# EAGLE board usb-isolator (EAGLE 7.7.0)
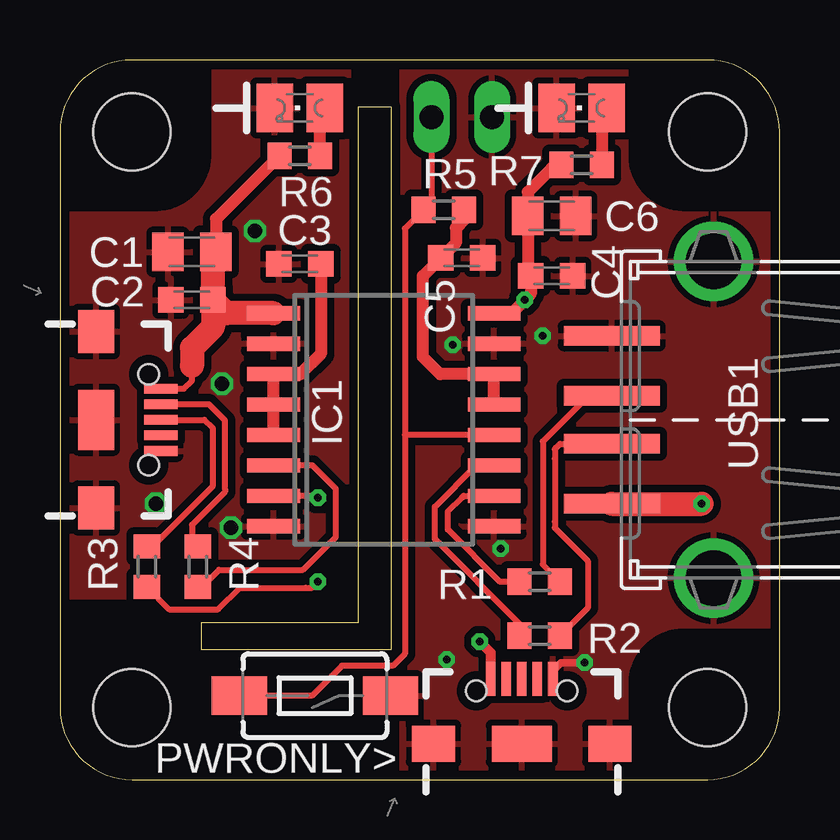
[diagram p0: board, top side]
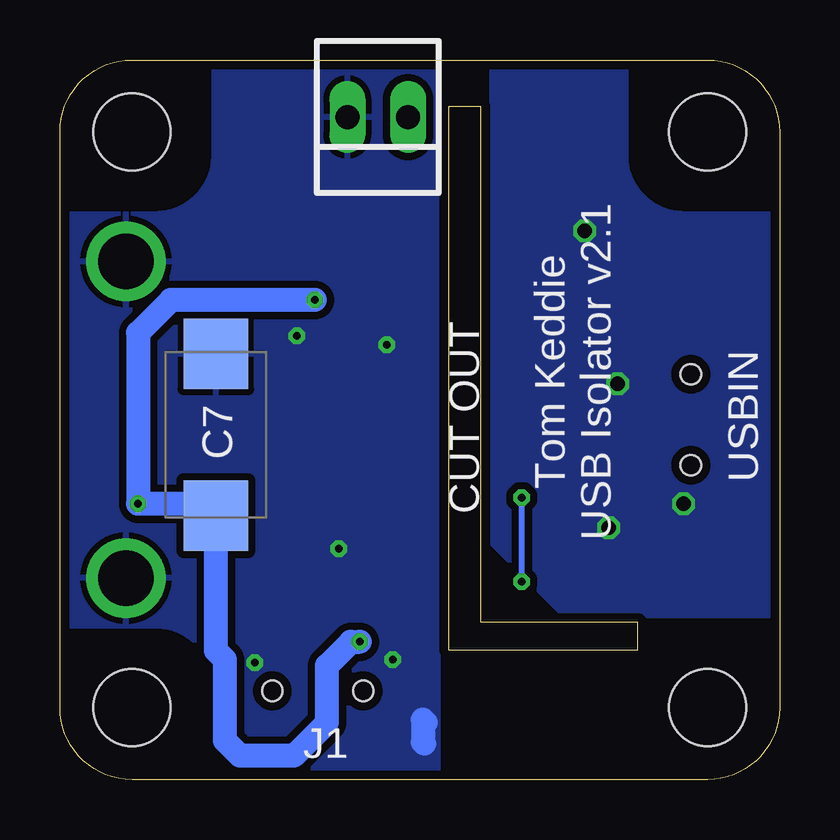
[diagram p1: board, bottom side, seen from below]

Size 30 x 30 mm. Coordinates in mm from the lower left corner, seen from the top.
Outline: 12.45,28.05 13.8,28.05 13.8,5.4 12.45,5.4 5.9,5.4 5.9,6.55 12.45,6.55 12.45,28.05
Copper layers (1*16): Top 0.0356mm / dielectric 1.5011mm / Bottom 0.0356mm
Design rules "laenpcborder": minimum track width 6mil, minimum drill 13mil, track to track 6mil, track to pad 6mil, pad to pad 6mil, via to via 6mil, smd to smd 6mil, copper to edge 15mil, drill to drill 6mil, minimum pad ring 7mil, minimum via ring 7mil, stop-mask expansion 4mil, vias tented up to drill 0mil, thermal gap 10mil
Net classes: 1 differential: width 0.25 mm, drill 0.305 mm, clearance 0.25 mm; 2 isolated: width 0.25 mm, clearance 1 mm

## Footprints (pad centres in the part's own frame; a part is rotated, then mirrored left to right if it is on the bottom)
C0805K = smd 1.3 x 1.6: 1 -1,0; 2 1,0
C0603K = smd 1.05 x 1.08: 1 -0.875,0; 2 0.875,0
D/7343-31W = smd 2.95 x 2.7: + 3.375,0; - -3.375,0
SO16W = smd 0.6 x 2.2: 1 -4.445,-4.6; 2 -3.175,-4.6; 3 -1.905,-4.6; 4 -0.635,-4.6; 5 0.635,-4.6; 6 1.905,-4.6; 7 3.175,-4.6; 8 4.445,-4.6; 9 4.445,4.6; 10 3.175,4.6; 11 1.905,4.6; 12 0.635,4.6; 13 -0.635,4.6; 14 -1.905,4.6; 15 -3.175,4.6; 16 -4.445,4.6
USB-AB-MICRO-SMD_V03 = smd 1.4 x 0.4: D+1 2.7,0; D-1 2.7,0.65; GND1 2.7,-1.3; ID1 2.7,-0.65; VBUS1 2.7,1.3 | smd 1.5 x 1.8: SHIELD1 0,3.68; SHIELD3 0,-3.68 | smd 1.5 x 2.5: SHIELD2 0,0 | hole 0.85: 2.2,1.9; 2.2,-1.9
LED-805 = smd 2.032 x 1.524: A 0,-1.05; C 0,1.05
22-23-2021 = drill 1 long: 1 -1.27,0; 2 1.27,0
R0603 = smd 1 x 1.1: 1 -0.85,0; 2 0.85,0
TACTILE-SWITCH-1101NE = smd 2.3 x 1.6: 1 -3.15,0; 2 3.15,0
CONN_USB_A_F = smd 0.8 x 4: 1 -3.5,7; 2 -1,7; 3 1,7; 4 3.5,7 | drill 2.3: B1 -6.6,2.75; B2 6.6,2.75
DP3030_V2 = hole 3.2: 3,3; 27,3; 27,27; 3,27

## Placement (x,y rotation side)
C1  10uF  [C0805K]  5.5,22 180 top
C2  0.1uF  [C0603K]  5.5,20 180 top
C3  0.1uF  [C0603K]  10,21.5 180 top
C4  0.1uF  [C0603K]  20.5,21 0 top
C5  0.1uF  [C0603K]  16.75,21.75 0 top
C6  10uF  [C0805K]  20.5,23.5 0 top
C7  47uF  [D/7343-31W]  23.5,14.38 270 bottom
IC1  ADUM3160BRWZ  [SO16W]  13.5,15 270 top
J1  [USB-AB-MICRO-SMD_V03]  19.25,1.5 90 top
LED1  [LED-805]  10,28 90 top
LED2  [LED-805]  21.75,28 90 top
PIN  22-23-2021  [22-23-2021]  16.75,27.62 180 bottom
R1  24R  [R0603]  20,8.25 180 top
R2  24R  [R0603]  20,6 180 top
R3  24R  [R0603]  5.75,8.88 90 top
R4  24R  [R0603]  3.62,8.88 270 top
R5  10K  [R0603]  16,23.75 0 top
R6  1K  [R0603]  10,26 0 top
R7  1K  [R0603]  21.75,25.62 0 top
S1  SWITCH-MOMENTARY-2SMD-1101NE  [TACTILE-SWITCH-1101NE]  10.62,3.5 180 top
USB1  CON-USB-F-2PB  [CONN_USB_A_F]  30,15 90 top
USB-ISOLATOR  PCB_DP_SQUARE-3X3V2  [DP3030_V2]  0,0 0 top
USBIN  [USB-AB-MICRO-SMD_V03]  1.5,15 0 top

## Library data of the parts
C1-C7 = rcl
IC1 LED1 LED2 = semiconductors
J1 USBIN = SparkFun-Connectors; PROD_ID: CONN-11794
PIN = con-molex; MF: MOLEX; MPN: 22-23-2021; OC_FARNELL: 1462926; OC_NEWARK: 25C3832
R1-R7 = resistor
S1 = SparkFun-Electromechanical; PROD_ID: SWCH-00815
USB1 USB-ISOLATOR = mechanical

## Nets
DD_N [differential]: R2.1 USB1.2
DD_P [differential]: R1.1 USB1.3
GND1: C1.2 C2.2 C3.2 IC1.2 IC1.8 LED1.C USBIN.GND1 USBIN.SHIELD1 USBIN.SHIELD2 USBIN.SHIELD3
GND2: C4.2 C5.2 C6.2 C7.- IC1.9 IC1.15 J1.GND1 J1.SHIELD1 J1.SHIELD2 J1.SHIELD3 LED2.C PIN.2 S1.1 USB1.4 USB1.B1 USB1.B2
N$12: LED1.A R6.2
N$13: LED2.A R7.2
PIN: IC1.12 PIN.1 R5.1 S1.2
R_DD_N [differential]: IC1.11 R2.2
R_DD_P [differential]: IC1.10 R1.2
R_UD_N [differential]: IC1.6 R3.1
R_UD_P [differential]: IC1.7 R4.2
UD_N [differential]: R4.1 USBIN.D+1
UD_P [differential]: R3.2 USBIN.D-1
VBUS1: C1.1 C2.1 IC1.1 R6.1 USBIN.VBUS1
VBUS2: C4.1 C6.1 C7.+ IC1.16 J1.VBUS1 R7.1 USB1.1
VDD1: C3.1 IC1.3 IC1.4 IC1.5
VDD2: C5.1 IC1.13 IC1.14 R5.2

## Tracks (layer width: path | path; a pad name or v marks a point on that pad's centre or on a via)
DD_N
  Top 0.25: R2.1 22,7.15 22,9.12 20.62,10.5 20.62,10.75 20.62,13.38 20.62,13.77 20.68,13.82 20.85,14 USB1.2
DD_P
  Top 0.25: R1.1 20.12,8.97 20.12,14.1 22.02,16 USB1.3
GND1  (via drill 0.6)
  other vias: 4,11.5 7.12,10.5 6.75,16.5 8.12,22.88
  pour Top (isolate 0.305): 0,30 12,30 12,7.62 0,7.62
  pour Bottom (isolate 0.305): 0,30 12,30 12,9.88 9,6.88 0,6.88
GND2  (via drill 0.33)
  Top 0.305: J1.GND1 20.55,4.55 20.75,4.75 20.88,4.88 v21.88,4.88
  Bottom 1: 14.75,2.38 14.88,2.5 14.88,1.55 14.82,1.5
  other vias: 18.38,9.62 16.12,5 20.12,18.5 16.38,18.12
  pour Bottom (isolate 0.305): 14.25,30 30,30 30,0 14.25,0
  pour Top (isolate 0.305): 30,30 14.25,30 14.25,0 30,0
N$12
  Top 0.5: R6.2 10.85,27.9 LED1.A
N$13
  Top 0.5: LED2.A 22.6,28.02 R7.2
PIN
  Top 0.25: 14.38,14.38 14.38,22.98 R5.1 15.48,24.08 PIN.1 | IC1.12 14.38,14.38 | 14.38,14.38 14.38,5.25 13.88,4.75 11.75,4.75 10.5,3.5 S1.2
  Top 0.5: IC1.12
R_DD_N
  Top 0.25: R2.2 19.15,6.5 15.62,10.02 15.62,11.38 17.34,13.1 IC1.11
R_DD_P
  Top 0.25: R1.2 18.35,8.25 16.18,10.43 16.18,11.18 16.75,11.75 16.82,11.82 IC1.10
R_UD_N
  Top 0.25: R3.1 5.78,8.03 6.12,8.38 6.25,8.38 6.62,8.75 10.12,8.75 11.5,10.12 11.5,12.12 10.53,13.1 IC1.6
R_UD_P  (via drill 0.33)
  Top 0.25: R4.2 4.55,7.1 6.6,7.1 7.5,8 10.25,8 10.5,8 v10.75,8.25 | v10.75,11.75 10.68,11.82 IC1.7
  Bottom 0.25: v10.75,8.25 v10.75,11.75
UD_N
  Top 0.25: USBIN.D+1 6.02,15 6.38,14.65 6.38,12.25 3.88,9.75 3.65,9.75 R4.1
UD_P
  Top 0.25: USBIN.D-1 6.2,15.65 6.88,14.98 6.88,12.12 6.88,12 5.5,10.62 5.5,9.85 R3.2
VBUS1
  Top 0.25: USBIN.VBUS1 5.17,16.3 5.5,16.62 5.5,17.25
  Top 0.5: R6.1 9.12,26 6.5,23.38 C1.1
  Top 1: IC1.1 6.93,19.45 C2.1 | C2.1 6.38,21.88 C1.1 | C2.1 6.38,18.88 5.5,18 5.5,17.25
VBUS2  (via drill 0.33)
  Top 0.406: v17.5,5.75 17.88,5.38 17.95,5.3 J1.VBUS1
  Top 0.5: IC1.16 18.16,19.5 18.88,19.5 v19.38,20 19.62,20.25 C4.1 19.5,21.12 C6.1 19.5,24.5 20.5,25.5 20.62,25.62 R7.1
  Top 1: USB1.1 v26.75,11.5
  Bottom 1: v19.38,20 25.38,20 26.75,18.62 v26.75,11.5 24,11.5 C7.+ 23.5,5.38 23.12,5 23.12,1.62 22.5,1 20.25,1 18.88,2.38 18.88,4.75 17.88,5.75 v17.5,5.75
VDD1
  Top 0.5: IC1.5 IC1.4 IC1.3 | C3.1 10.88,17.75 10.03,16.91 IC1.3 | 9.28,16.91 IC1.3
VDD2
  Top 0.5: IC1.13 IC1.14 15.85,16.91 15.12,17.62 15.12,21 C5.1 16.5,22.38 16.5,23 16.85,23.35 R5.2

## Text on the board
tPlace: PWRONLY>
bPlace: Tom Keddie / USB Isolator v2.1 | CUT OUT
tOrigins: o